# EAGLE board radio-v4.0 (EAGLE 9.5.2)

No outline drawn. Coordinates in mm, seen from the top.
Copper layers (1*16): Top 0.035mm / dielectric 1.5mm / Bottom 0.035mm
Design rules "default": minimum track width 6mil, minimum drill 0.35mm, track to track 6mil, track to pad 6mil, pad to pad 6mil, via to via 6mil, smd to smd 6mil, copper to edge 40mil, drill to drill 6mil, minimum pad ring 10mil, minimum via ring 8mil, stop-mask expansion 4mil, vias tented up to drill 0mil, thermal gap 10mil

## Footprints (pad centres in the part's own frame; a part is rotated, then mirrored left to right if it is on the bottom)
ECA-0JM221-HGT_HORIZ = smd 4.5 x 3: P$1 0,1.905 | smd 4.5 x 3 bottom: P$2 0,1.905
C0805 = smd 1.3 x 1.5: 1 -0.95,0; 2 0.95,0
C0603 = smd 1.1 x 1: 1 -0.85,0; 2 0.85,0
C1210 = smd 1.6 x 2.7: 1 -1.4,0; 2 1.4,0
CHIP-LED0603 = smd 0.8 x 0.8: A 0,-0.75; C 0,0.75
HFW8R-1ST = smd 0.6 x 2: 1 -3.5,3.25; 2 -2.5,3.25; 3 -1.5,3.25; 4 -0.5,3.25; 5 0.5,3.25; 6 1.5,3.25; 7 2.5,3.25; 8 3.5,3.25 | smd 0.7 x 4.2: LEG1 -4.5,1.15; LEG2 4.5,1.15
TC2050-IDC-NL = smd 0.787 x 0.787: 1 -2.54,-0.635; 2 -1.27,-0.635; 3 0,-0.635; 4 1.27,-0.635; 5 2.54,-0.635; 6 2.54,0.635; 7 1.27,0.635; 8 0,0.635; 9 -1.27,0.635; 10 -2.54,0.635 | hole 0.991: -3.81,0; 3.81,1.015; 3.81,-1.015
R0603 = smd 1 x 1.1: 1 -0.85,0; 2 0.85,0
ISM43340 = smd 0.847 x 0.847: P$1 8.742,6.89; P$2 7.285,6.89; P$3 5.828,6.89; P$4 4.371,6.89; P$5 2.914,6.89; P$6 1.457,6.89; P$7 0,6.89; P$8 -1.457,6.89; P$9 -2.914,6.89; P$10 -4.371,6.89; P$11 -5.828,6.89; P$12 -7.285,6.89; P$13 -8.742,6.89; P$14 -9.948,5.684; P$15 -9.948,4.263; P$16 -9.948,2.842; P$17 -9.948,1.421; P$18 -9.948,0; P$19 -9.948,-1.421; P$20 -9.948,-2.842; P$21 -9.948,-4.263; P$22 -9.948,-5.684; P$23 -8.742,-6.89; P$24 -7.285,-6.89; P$25 -5.828,-6.89; P$26 -4.371,-6.89; P$27 -2.914,-6.89; P$28 -1.457,-6.89; P$29 0,-6.89; P$30 1.457,-6.89; P$31 2.914,-6.89; P$32 4.371,-6.89; P$33 5.828,-6.89; P$34 7.285,-6.89; P$35 8.742,-6.89; P$36 9.948,-5.684; P$37 9.948,-4.263; P$38 9.948,-2.842; P$39 9.948,-1.421; P$40 9.948,0; P$41 9.948,1.421; P$42 9.948,2.842; P$43 9.948,4.263; P$44 9.948,5.684; P$45 -8.742,-5.684; P$46 -7.285,-5.684; P$47 -5.828,-5.684; P$48 -4.371,-5.684; P$49 -2.914,-5.684; P$50 -8.742,5.684; P$51 -7.285,5.684; P$52 -5.828,5.684; P$53 -4.371,5.684; P$54 -2.914,5.684
MPM3620GQV-P = smd 0.7 x 0.25: 1 -1.45,1.55; 12 1.45,1.55 | smd 1.1 x 0.25: 2 -1.25,0.9; 3 -1.25,0.25; 10 1.25,0.25; 11 1.25,0.9 | smd 0.25 x 0.7: 13 1.25,2.45; 14 0.75,2.45; 17 -0.75,2.45; 18 -1.25,2.45 | smd 0.25 x 1.1: 15 0.25,2.25; 16 -0.25,2.25 | smd 0.6 x 1.95: 456 -1,-1.25; 789 1,-1.25
SOT-553 = smd 0.3 x 0.45: 1 -0.5,0; 2 0,0; 3 0.5,0; 4 0.5,1.35; 5 -0.5,1.35
ISM43340-L77 = smd 0.6 x 0.35: 1 -6.6,4.745; 2 -6.6,4.015; 3 -6.6,3.285; 4 -6.6,2.555; 5 -6.6,1.825; 6 -6.6,1.095; 7 -6.6,0.365; 8 -6.6,-0.365; 9 -6.6,-1.095; 10 -6.6,-1.825; 11 -6.6,-2.555; 12 -6.6,-3.285; 13 -6.6,-4.015; 14 -6.6,-4.745; 31 6.6,-4.745; 32 6.6,-4.015; 33 6.6,-3.285; 34 6.6,-2.555; 35 6.6,-1.825; 36 6.6,-1.095; 37 6.6,-0.365; 38 6.6,0.365; 39 6.6,1.095; 40 6.6,1.825; 41 6.6,2.555; 42 6.6,3.285; 43 6.6,4.015; 44 6.6,4.745 | smd 0.35 x 0.6: 15 -5.475,-5.975; 16 -4.745,-5.975; 17 -4.015,-5.975; 18 -3.285,-5.975; 19 -2.555,-5.975; 20 -1.825,-5.975; 21 -1.095,-5.975; 22 -0.365,-5.975; 23 0.365,-5.975; 24 1.095,-5.975; 25 1.825,-5.975; 26 2.555,-5.975; 27 3.285,-5.975; 28 4.015,-5.975; 29 4.745,-5.975; 30 5.475,-5.975; 45 5.475,5.975; 46 4.745,5.975; 47 4.015,5.975; 48 3.285,5.975; 49 2.555,5.975; 50 1.825,5.975; 51 1.095,5.975; 52 0.365,5.975; 53 -0.365,5.975; 54 -1.095,5.975; 55 -1.825,5.975; 56 -2.555,5.975; 57 -3.285,5.975; 58 -4.015,5.975; 59 -4.745,5.975; 60 -5.475,5.975 | smd 1.15 x 1.15: 61 -6.6,5.975; 62 -6.6,-5.975; 63 6.6,-5.975; 64 6.6,5.975 | smd 0.7 x 0.7: 65 -2.31,-1.823; 66 -2.31,0.107; 67 -2.31,2.038; 68 -0.848,-3.003; 69 -0.848,3.003; 70 0.614,-1.823; 71 0.614,0.107; 72 0.614,2.038; 73 2.076,-3.003; 74 2.076,3.003; 75 3.538,-1.823; 76 3.538,0.107; 77 3.538,2.038

## Placement (x,y rotation side)
C1  220uF  [ECA-0JM221-HGT_HORIZ]  -8.89,-80.01 0 top
C2  10uF  [C0805]  -10.16,-113.03 0 top
C3  10uF  [C0805]  -3.81,-113.03 0 top
C4  1uF  [C0603]  -10.16,-119.38 0 top
C5  0.1uF  [C0603]  1.27,-111.76 0 top
C6  0.1uF  [C0603]  7.62,-111.76 0 top
C7  10uF 16V  [C1210]  -10.16,-45.72 0 top
C11  22uF  [C1210]  0,-45.72 0 top
C13  0.1uF  [C0603]  11.43,-66.04 0 top
D1  GREEN  [CHIP-LED0603]  7.62,-38.1 0 top
D2  GREEN  [CHIP-LED0603]  12.7,-38.1 0 top
D3  RED  [CHIP-LED0603]  3.81,-60.96 0 top
D4  GREEN  [CHIP-LED0603]  17.78,-38.1 0 top
D5  GREEN  [CHIP-LED0603]  22.86,-38.1 0 top
D6  YELLOW  [CHIP-LED0603]  2.54,-39.37 0 top
J1  HFW8R-1ST  [HFW8R-1ST]  10.16,-45.72 0 top
J2  TC2050-IDC-NL  [TC2050-IDC-NL]  22.86,-44.45 0 top
R1  88.7k 1%  [R0603]  19.05,-59.69 0 top
R2  100k  [R0603]  17.78,-66.04 0 top
R3  143.0k 1%  [R0603]  8.89,-59.69 0 top
R4  45.3k 1%  [R0603]  -10.16,-66.04 0 top
R5  1k  [R0603]  -5.08,-71.12 0 top
R6  680  [R0603]  -10.16,-71.12 0 top
R7  1k  [R0603]  -1.27,-71.12 0 top
R8  1k  [R0603]  2.54,-71.12 0 top
R9  1k  [R0603]  6.35,-71.12 0 top
R10  1k  [R0603]  24.13,-66.04 0 top
U1  ISM43340  [ISM43340]  1.27,-101.6 0 top
U2  MPM3620GQV-P  [MPM3620GQV-P]  -10.16,-36.83 0 top
U6  TPD2E2U06DRLR  [SOT-553]  1.27,-53.34 0 top
U7  TPD2E2U06DRLR  [SOT-553]  13.97,-53.34 0 top
U8  TPD2E2U06DRLR  [SOT-553]  -10.16,-60.96 0 top
U$1  ISM43340-L77  [ISM43340-L77]  -5.08,-129.54 0 top

## Library data of the parts
C1 = RoboJackets-Capacitors
C2-C7 C11 C13 = rcl; SPICEPREFIX: C
D1 D2 D4 D5 = RoboJackets-LEDs; DIGIKEY: 160-1446-1-ND; MPN: LTST-C191KGKT
D3 = RoboJackets-LEDs; DIGIKEY: 160-1447-1-ND; MPN: LTST-C191KRKT
D6 = RoboJackets-LEDs; DIGIKEY: 160-1448-1-ND; MPN: LTST-C191KSKT
J1 = RoboJackets-Connectors; DIGIKEY: 609-1788-1-ND; MPN: HFW8R-1STE1LF
J2 = RoboJackets-Connectors
R1 R2 R5-R10 = resistor
R3 R4 = rcl; SPICEPREFIX: R
U1 U$1 = RoboJackets-RF
U2 = mchair
U6-U8 = radio_in_progress

## Nets
3V3_PWR_IND: D2.A R6.1
5V_PWR_IND: D1.A R5.1
!CS!_RAD: J1.5 U1.P$12 U7.3
!RST!_GLB: J1.6 J2.10 U1.P$34 U7.5
+3.3V: C1.P$1 C2.1 C3.1 C4.1 C5.1 C6.1 C11.1 C13.1 J2.1 R3.2 R6.2 U1.P$2 U1.P$14 U1.P$15 U2.789
+5.0V: C7.1 J1.1 R2.1 R5.2 U2.16
AAM: R1.2 U2.18
DBG_ACT_RAD: R10.1 U1.P$27
DBG_ERR: D3.A R7.2
DBG_ERR_RAD: R7.1 U1.P$23
DBG_LNK_RAD: R9.1 U1.P$26
DBG_TLK_RAD: R8.1 U1.P$24
DGB_ACT: D6.A R10.2
DGB_LNK: D5.A R9.2
EN: R2.2 U2.17
FB: R3.1 R4.2 U2.1
GND: C1.P$2 C2.2 C3.2 C4.2 C5.2 C6.2 C7.2 C11.2 C13.2 D1.C D2.C D3.C D4.C D5.C D6.C J1.2 J2.3 J2.5 J2.9 R1.1 R4.1 U1.P$1 U1.P$3 U1.P$17 U1.P$20 U1.P$35 U1.P$36 U1.P$37 U1.P$38 U1.P$39 U1.P$40 U1.P$41 U1.P$42 U1.P$43 U1.P$44 U2.3 U2.12 U2.13 U2.14 U6.4 U7.4 U8.4 U$1.76 U$1.77
INT_RAD: J1.4 U1.P$13 U6.5
MISO: J1.3 U1.P$10 U6.3
MOSI: J1.7 U1.P$9 U8.3
N$1: U$1.5 U$1.7 U$1.38 U$1.47 U$1.57 U$1.58 U$1.59 U$1.60 U$1.61 U$1.62 U$1.63 U$1.64 U$1.65 U$1.66 U$1.67 U$1.68 U$1.69 U$1.70
SCK: J1.8 U1.P$11 U8.5
TCK_RAD: J2.4 U1.P$5
TDI_RAD: J2.8 U1.P$6
TDO_RAD: J2.6 U1.P$7
THERMAL_DNC: U2.456
TLK: D4.A R8.2
TMS_RAD: J2.2 U1.P$4

## Tracks (layer width: path | path; a pad name or v marks a point on that pad's centre or on a via)
3V3_PWR_IND  (1 unrouted)
5V_PWR_IND  (1 unrouted)
!CS!_RAD  (2 unrouted)
!RST!_GLB  (3 unrouted)
+3.3V  (14 unrouted)
+5.0V  (4 unrouted)
AAM  (1 unrouted)
DBG_ACT_RAD  (1 unrouted)
DBG_ERR  (1 unrouted)
DBG_ERR_RAD  (1 unrouted)
DBG_LNK_RAD  (1 unrouted)
DBG_TLK_RAD  (1 unrouted)
DGB_ACT  (1 unrouted)
DGB_LNK  (1 unrouted)
EN  (1 unrouted)
FB  (2 unrouted)
GND  (43 unrouted)
INT_RAD  (2 unrouted)
MISO  (2 unrouted)
MOSI  (2 unrouted)
N$1  (17 unrouted)
SCK  (2 unrouted)
TCK_RAD  (1 unrouted)
TDI_RAD  (1 unrouted)
TDO_RAD  (1 unrouted)
TLK  (1 unrouted)
TMS_RAD  (1 unrouted)